# Altium PCB BLDC_Drive.PcbDoc (part 1 of 2)
Units mm, origin at the board's own origin, x right, y up, seen from the top; angles counter-clockwise.
Board outline 173.9 x 91 mm, 4 copper layers (Top Layer, Layer 1, Layer 2, Bottom Layer), stack 0.48 mm thick; 165 components, 96 nets, 478 pads, 711 vias.
Unrouted connection lines stored in the file: 223.
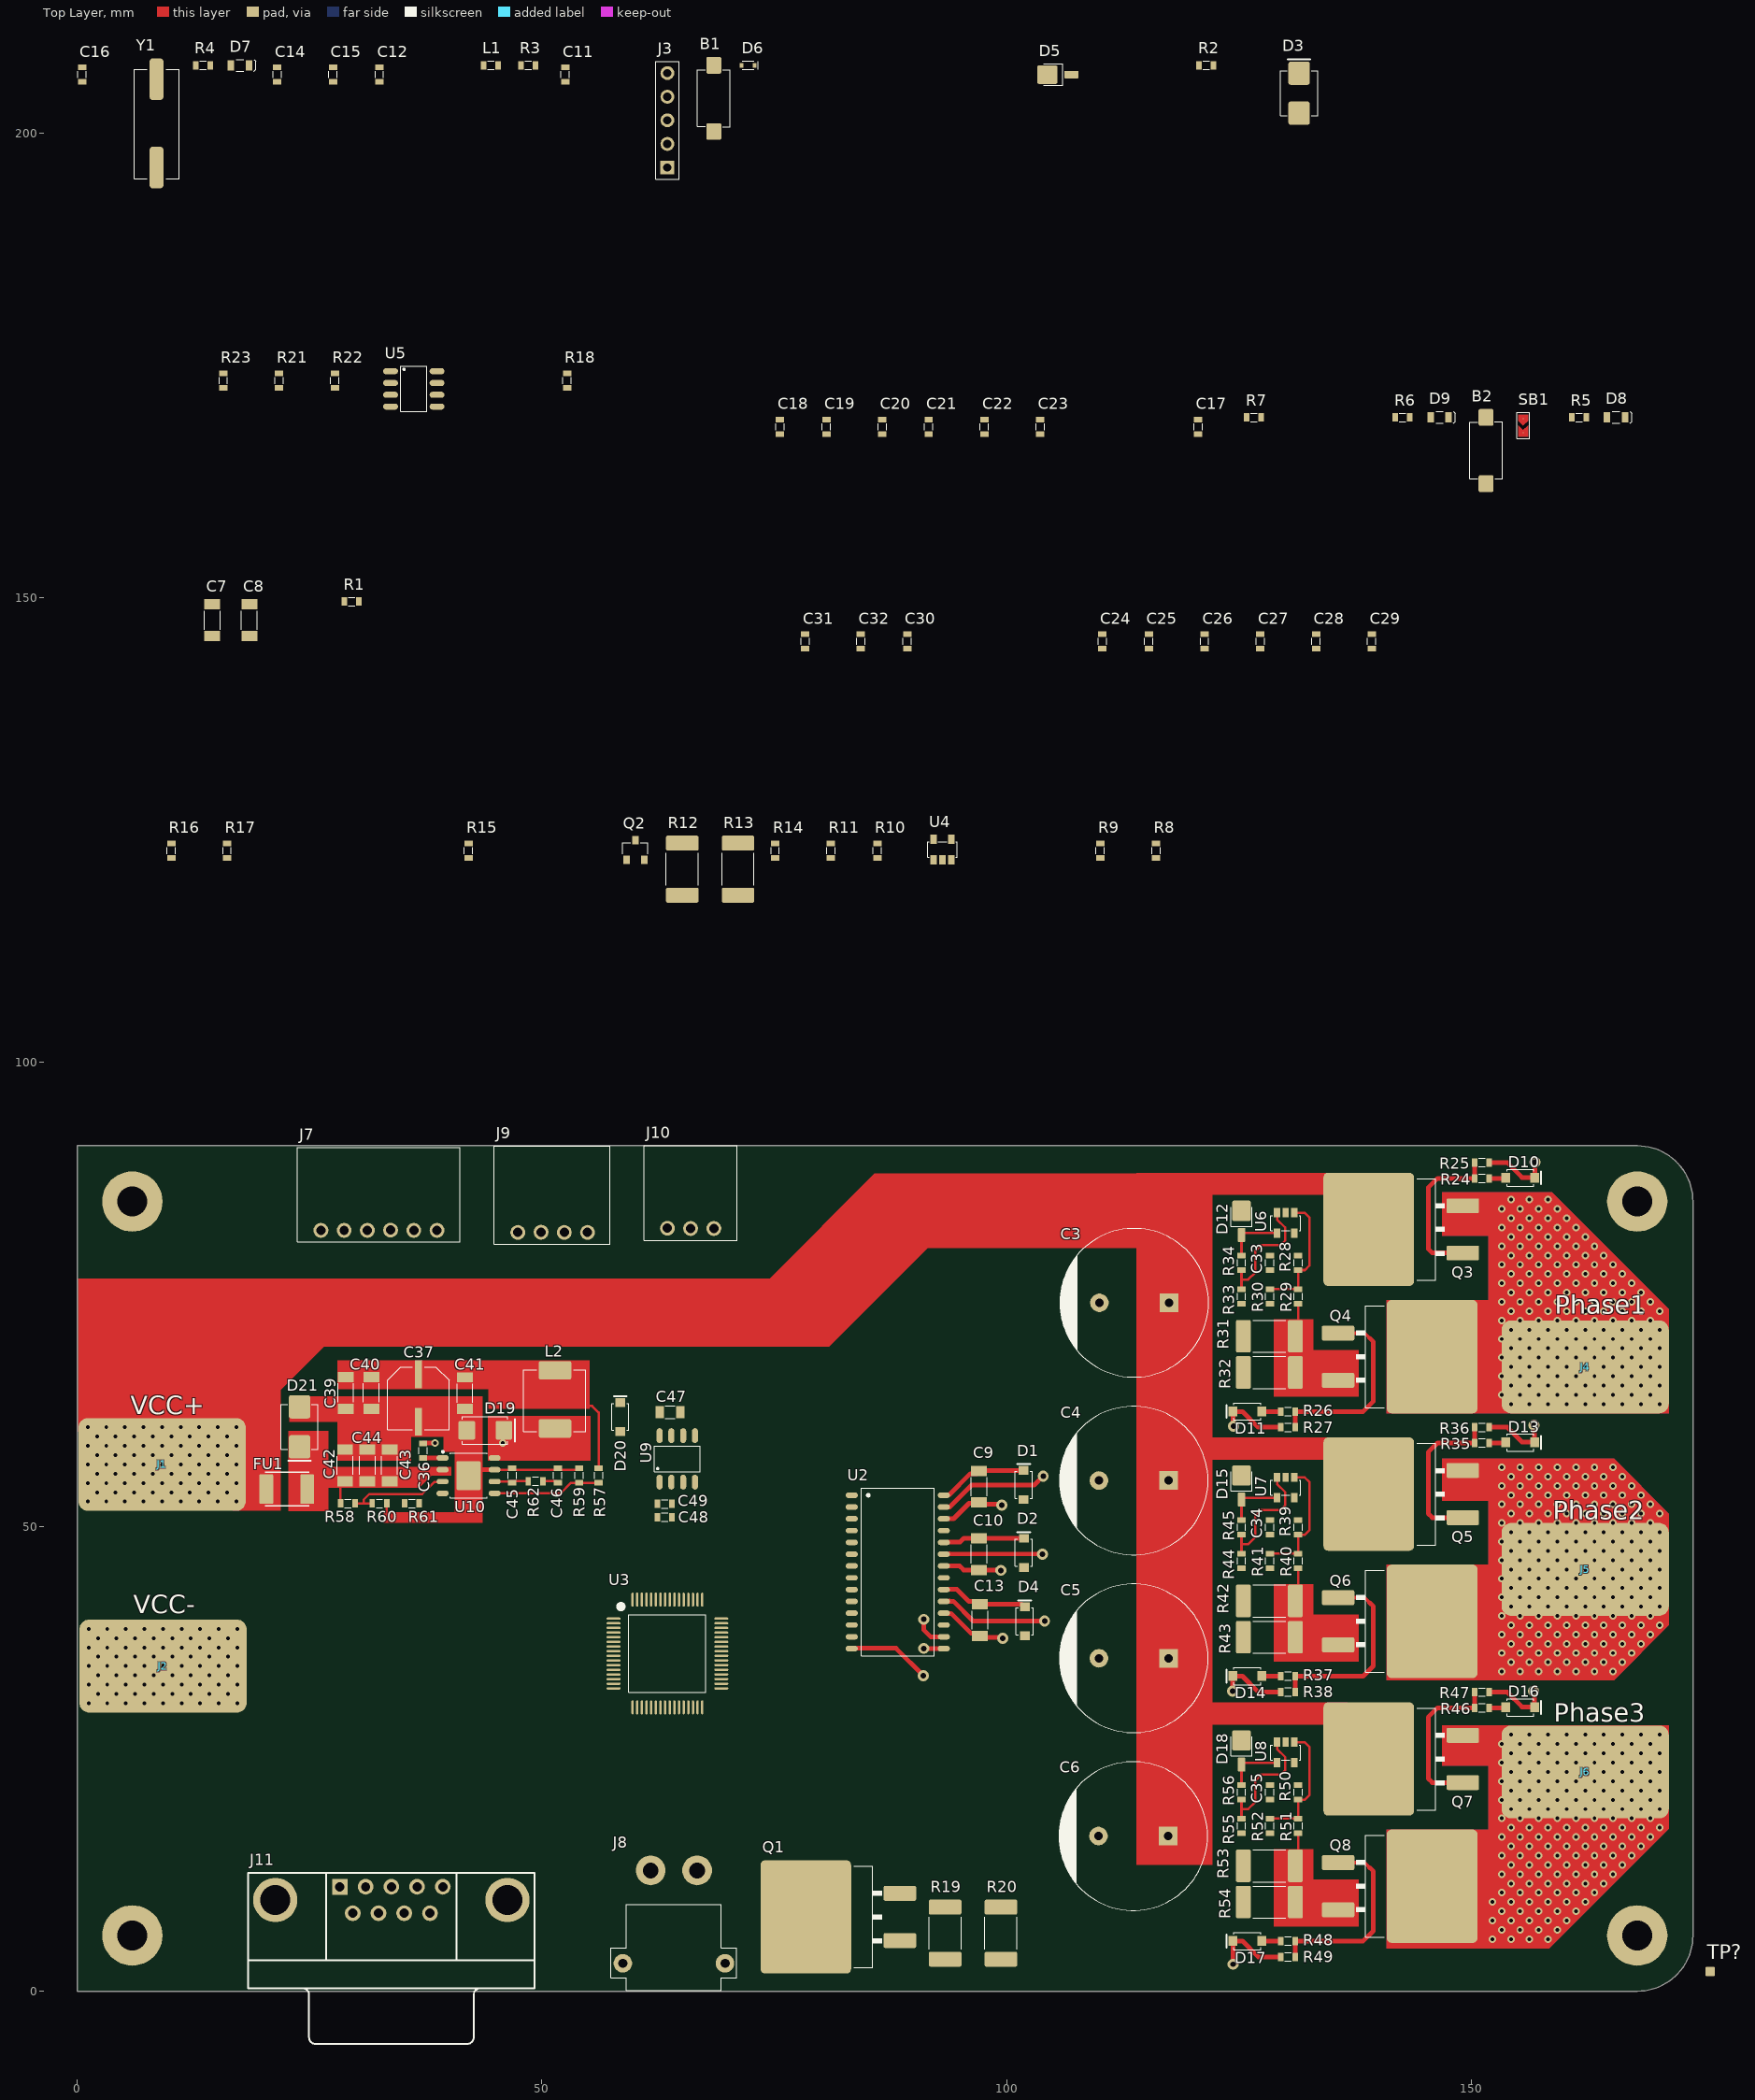
[diagram p0: Top Layer view]
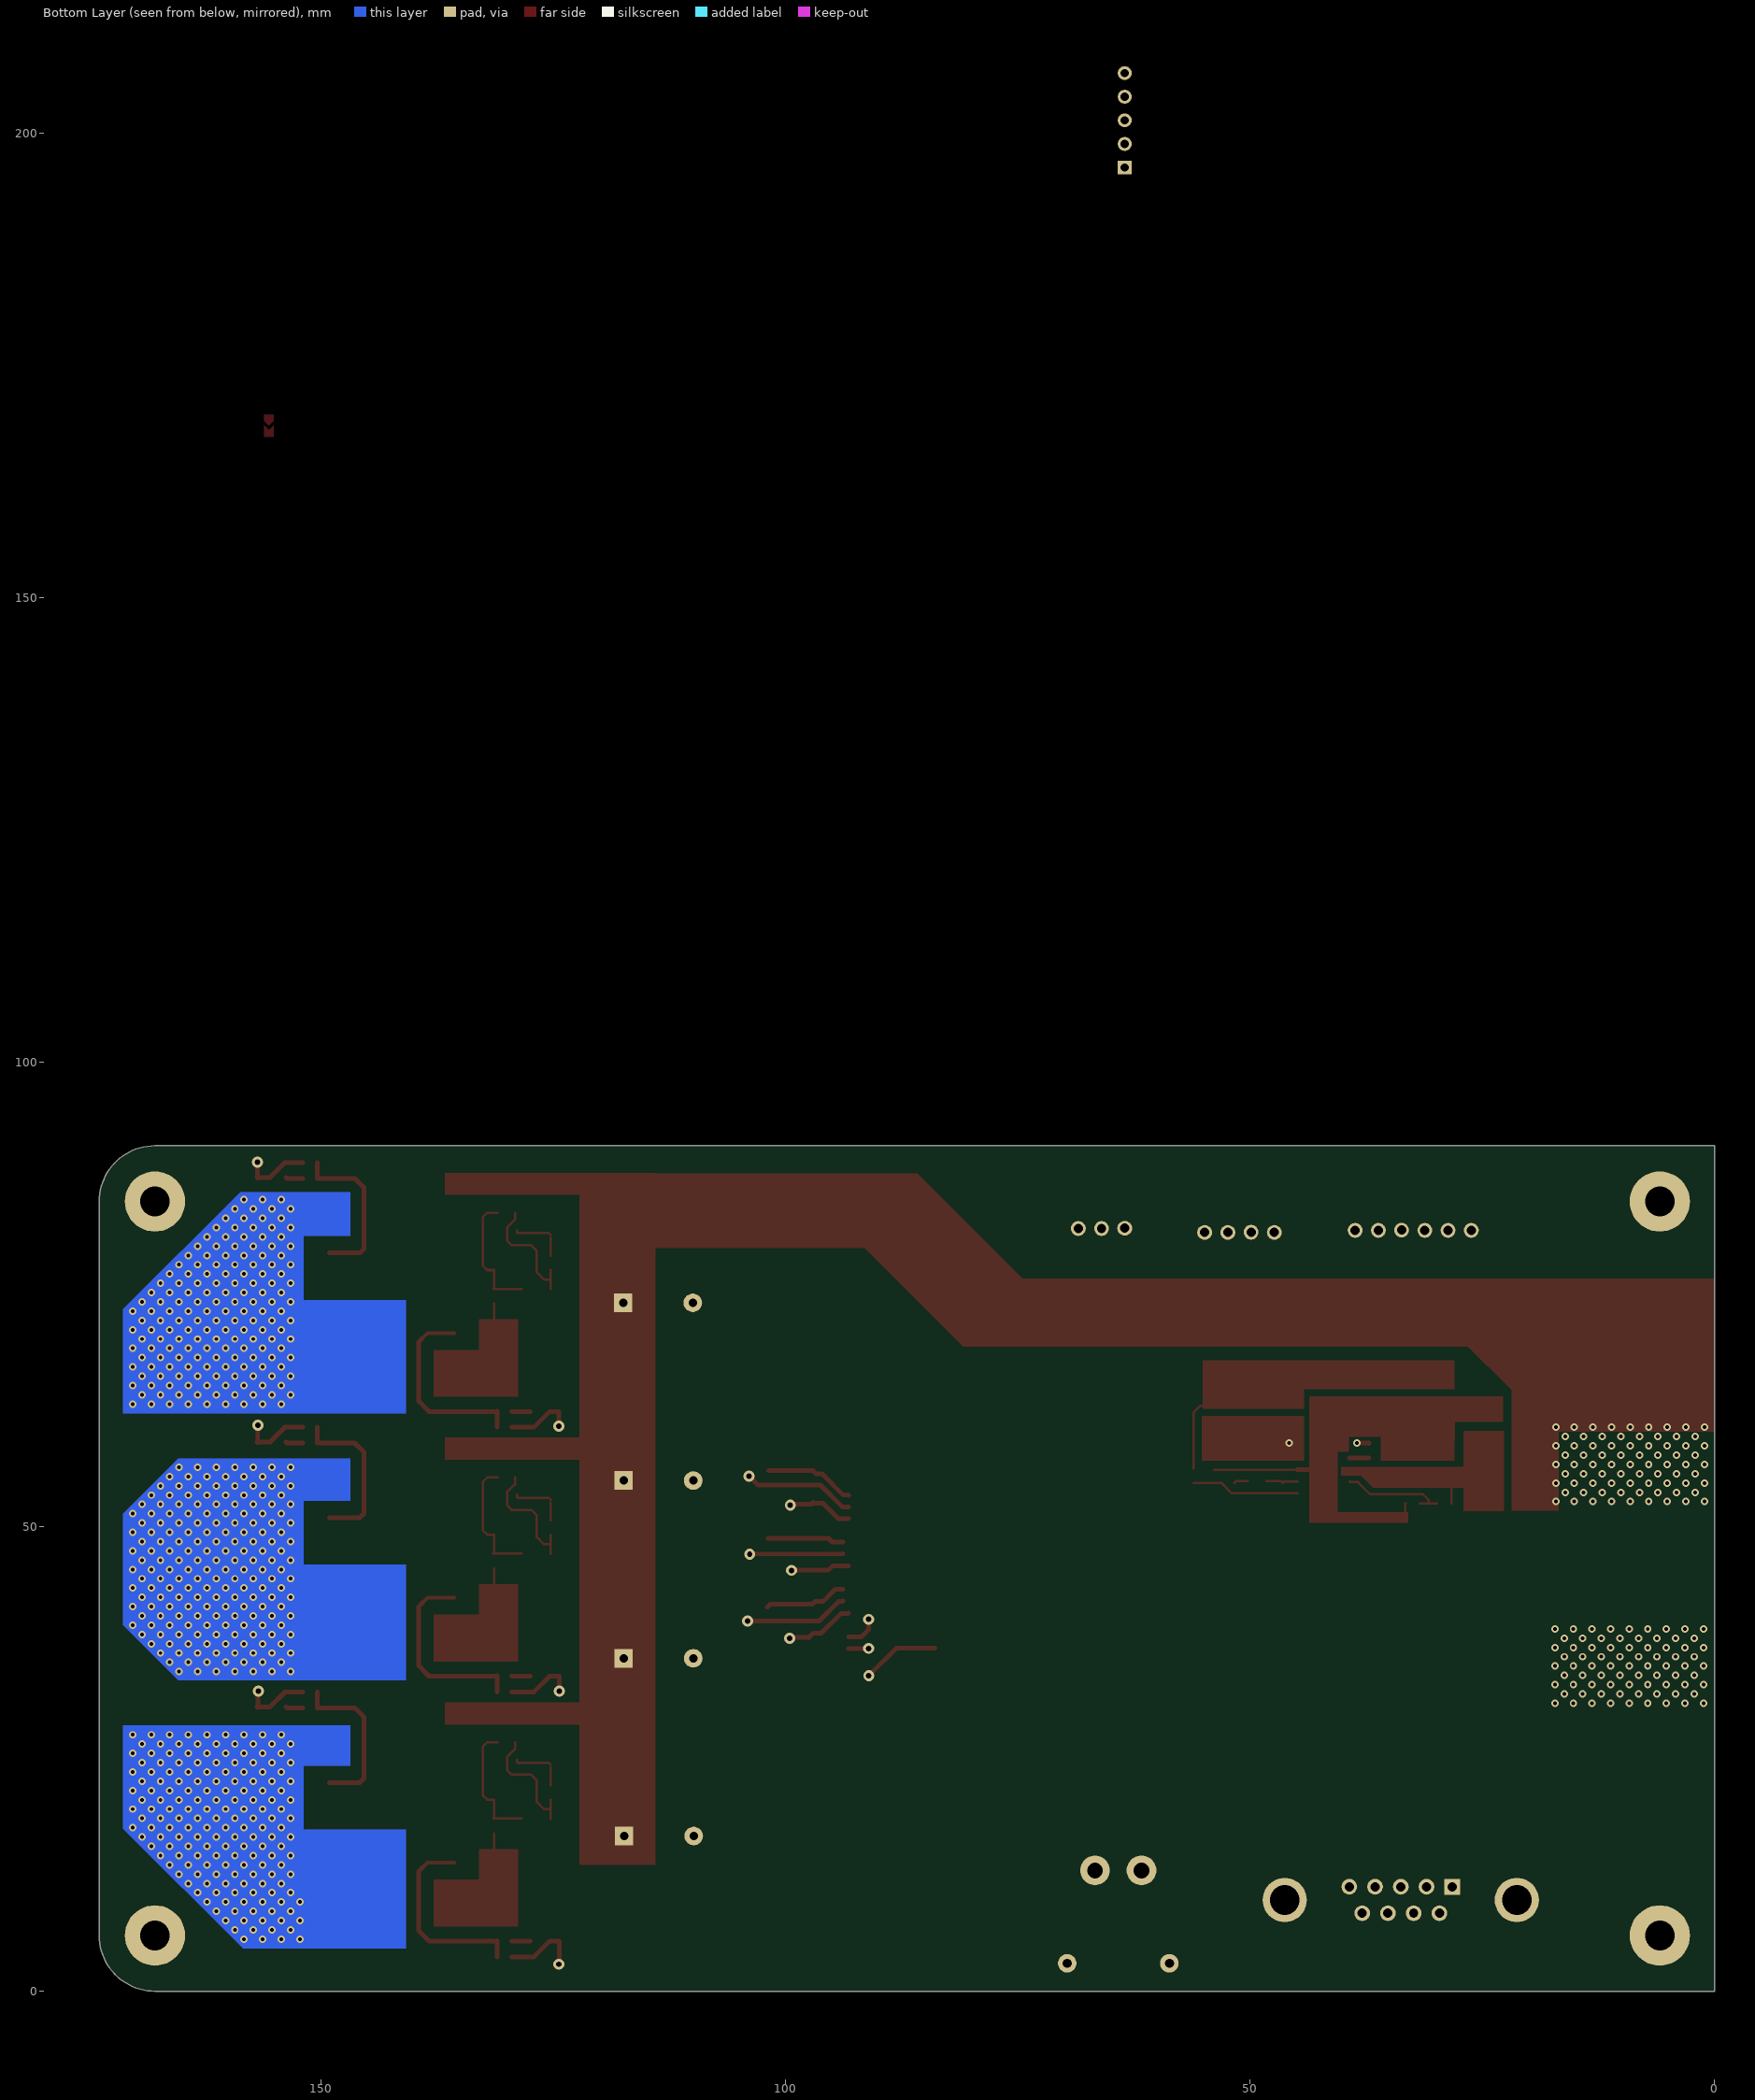
[diagram p1: Bottom Layer view, seen from below]
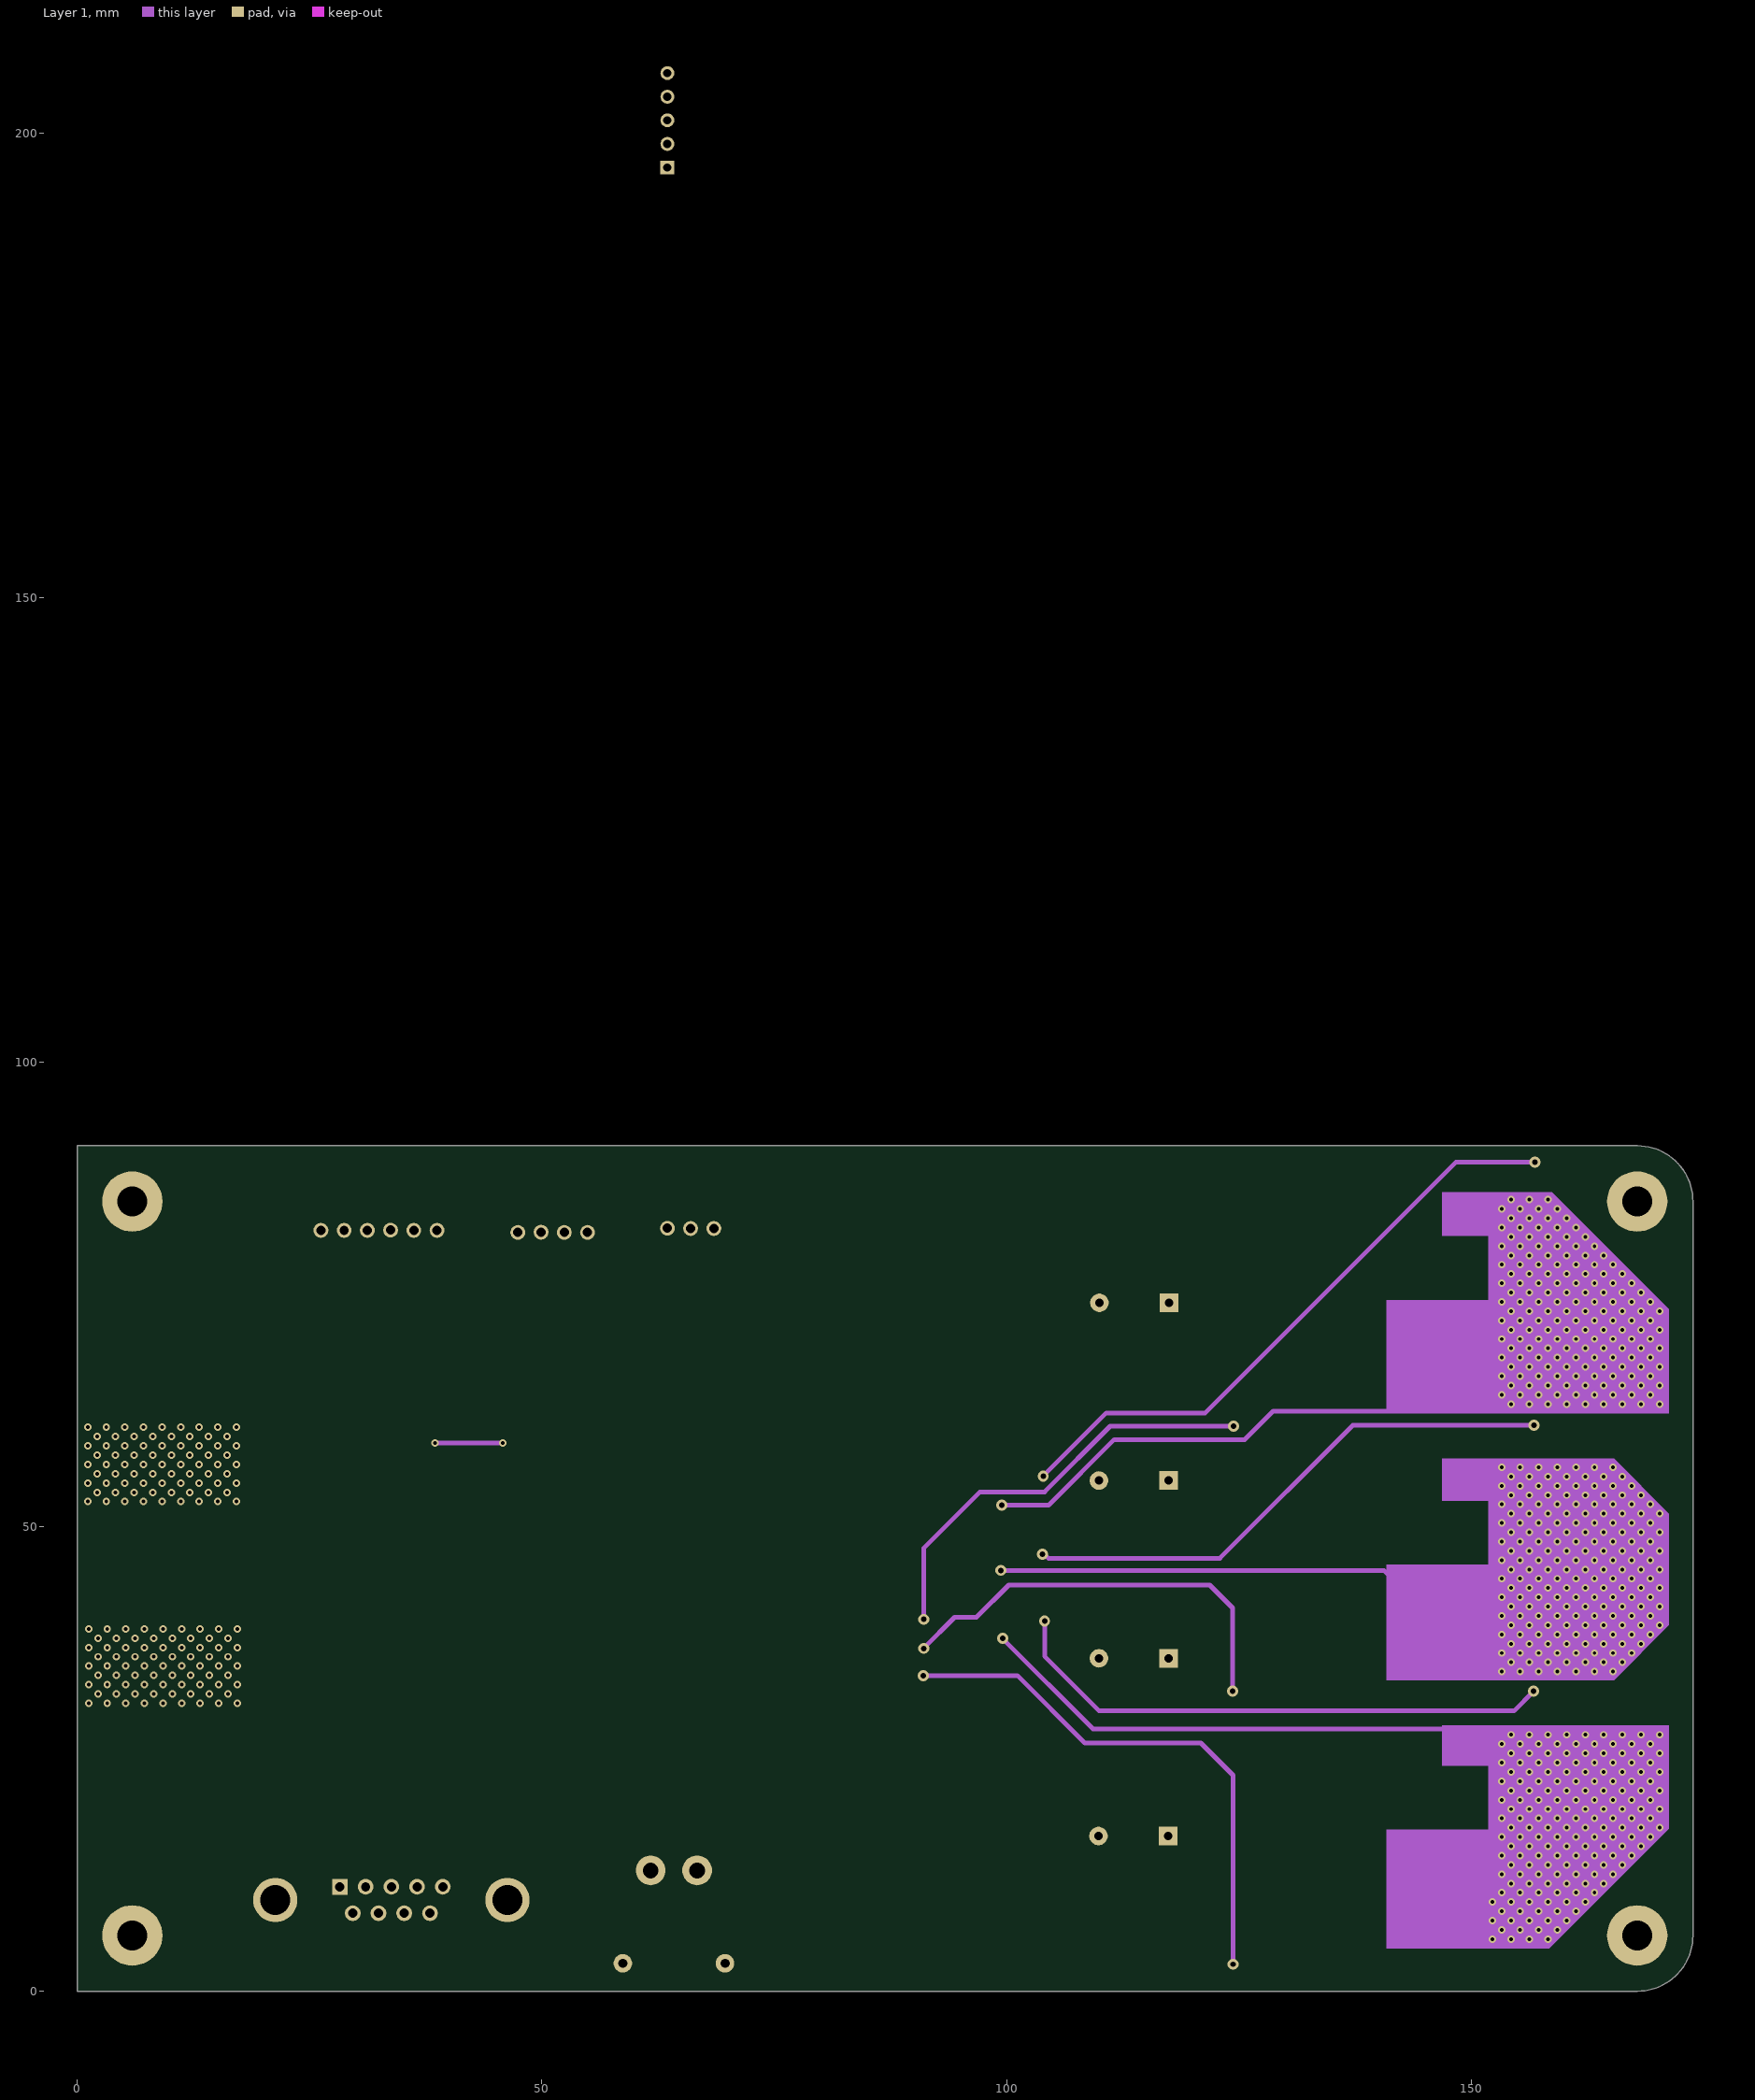
[diagram p2: Layer 1]

## Layer stack, top to bottom
Top Solder: solder mask 0.0102, Solder Resist, Dk 3.5
Top Layer: signal copper 0.0045
Dielectric 2: prepreg 0.0711, PP-006, Dk 4.1
Layer 1: signal copper 0.0045
Dielectric 1: dielectric 0.32, FR-4, Dk 4.8
Layer 2: signal copper 0.0045
Dielectric 3: prepreg 0.0711, PP-006, Dk 4.1
Bottom Layer: signal copper 0.0045
Bottom Solder: solder mask 0.0102, Solder Resist, Dk 3.5

## Board outline
0,0 167.9,0 ccw(c167.9,6) 173.9,6 173.9,85 ccw(c167.9,85) 167.9,91 0,91

## Design rules (kind name [scope] priority, off if disabled: settings)
AcuteAngle [All] p1: minimum=3.50000000000000E+0001 checktracksonly=FALSE
BoardOutlineClearance "BoardOutlineClearance 1" [All] p1: gap=0.25 ignorepadtopadclearanceinfootprint=FALSE except(0: Arc-SplitContinuation Track-SplitContinuation SMDPad-SplitContinuation THPad-SplitContinuation Via-SplitContinuation Fill-SplitContinuation Poly-SplitContinuation Region-SplitContinuation Text-SplitContinuation) // Milling
Clearance ClearanceHV [InNetClass('HV')] p1: gap=0.6 ignorepadtopadclearanceinfootprint=FALSE
Clearance "Clearance-1 1/2 Oz" [All] p2: gap=0.125 ignorepadtopadclearanceinfootprint=FALSE except(0.2: Arc-Fill Arc-Poly Track-Fill Track-Poly SMDPad-SMDPad SMDPad-Fill SMDPad-Poly THPad-Fill THPad-Poly Via-Fill Via-Poly Fill-Fill Fill-Poly Poly-Poly Poly-Region Poly-Text; 0.25: Arc-Hole Track-Hole SMDPad-Hole THPad-Hole Via-Hole Fill-Hole Poly-Hole Region-Hole Text-Hole) // Standart
ComponentClearance [All] p1: gap=0.1 collisioncheckmode=3 verticalgap=0.1 showdistances=FALSE
DiffPairsRouting "DiffPairsRouting 1/2 Oz" [All] p1: maxlimit=0.254 minlimit=0.125 mostfreqgap=0.254 toplayer_minwidth=0.125 toplayer_maxwidth=0.381 toplayer_prefwidth=0.381 midlayer1_minwidth=0.125 midlayer1_maxwidth=0.381 midlayer1_prefwidth=0.381 midlayer2_minwidth=0.125 midlayer2_maxwidth=0.381 midlayer2_prefwidth=0.381 bottomlayer_minwidth=0.125 bottomlayer_maxwidth=0.381 bottomlayer_prefwidth=0.381 maxuncoupledlength=12.7
Height [All] p1: minheight=0 maxheight=50 prefheight=12.7
HoleSize "Minimum HoleSize" [IsPad] p1: absolutevalues=TRUE maxlimit=5.9 minlimit=0.6 maxpercent=80.000 minpercent=20.000
HoleSize "Minimum HoleSize VIA 1" [IsVia] p2: absolutevalues=TRUE maxlimit=5.9 minlimit=0.3 maxpercent=80.000 minpercent=20.000 // Standart
HoleToHoleClearance Hole2HoleClearance [All] p1: gap=0.25 allowstackedmicrovias=FALSE
MinimumAnnularRing "Minimum AR VIA Standart" [All] p1: minimumring=0.15
MinimumAnnularRing "Minimum AR PAD Standart" [All] p2: minimumring=0.2
MinimumSolderMaskSliver "SolderMask Bridge Standart" [All] p1: minsoldermaskwidth=0.15 // All Masks
PlaneClearance "PlaneClearance-1 1/2 Oz" [All] p1: clearance=0.2 // Standart
PlaneConnect "TermalConnect-1 1/2 Oz" [All] p1: planeconnectstyle=Relief reliefexpansion=0.2 reliefentries=4 reliefconductorwidth=0.2 reliefairgap=0.2 // Standart
PolygonConnect "PolygonConnect-1 1/2 Oz" [All] p1: thpad.connectstyle=Relief thpad.reliefconductorwidth=0.254 thpad.reliefentries=4 thpad.polygonreliefangle="90 Angle" thpad.airgapwidth=0.2 smdpad.connectstyle=Relief smdpad.reliefconductorwidth=0.254 smdpad.reliefentries=4 smdpad.polygonreliefangle="90 Angle" smdpad.airgapwidth=0.2 via.connectstyle=Direct via.reliefconductorwidth=0.254 via.reliefentries=4 via.polygonreliefangle="90 Angle" via.airgapwidth=0.254 // Standart
RoomDefinition "Half-Bridge Phase2" [InComponentClass('Half-Bridge Phase2')] p1: confinementstyle=ConfineIn formatcopy=TRUE lockcomponents=FALSE outline 122,31.215 157.8,31.215 157.8,61.415 122,61.415
RoomDefinition "Half-Bridge Phase1" [InComponentClass('Half-Bridge Phase1')] p2: confinementstyle=ConfineIn formatcopy=TRUE lockcomponents=FALSE outline 122,59.7 157.8,59.7 157.8,89.9 122,89.9
RoomDefinition "Half-Bridge Phase3" [InComponentClass('Half-Bridge Phase3')] p3: confinementstyle=ConfineIn formatcopy=TRUE lockcomponents=FALSE outline 122,2.7 157.8,2.7 157.8,32.9 122,32.9
RoutingCorners [All] p1 off: cornerstyle=45-Degree minsetback=2.54 maxsetback=2.54
RoutingVias [All] p1: holewidth=0.4 width=0.8 viastyle="Through Hole" minholewidth=0.3 minwidth=0.6 maxholewidth=5.9 maxwidth=8.9
SilkToSilkClearance Silk2SilkClearance [All] p1 off: silktosilkclearance=0.15
SilkToSolderMaskClearance Silk2SolderMaskClearance [IsPad] p1 off: minsilkscreentomaskgap=0.15 clearancetoexposedcopper=TRUE
SolderMaskExpansion SolderMaskExpansion-1 [All] p1: expansion=0.05 istentingtop=FALSE // Standart
UnRoutedNet [All] p1: checkbadconnections=TRUE
Width "Width 1/2 Oz" [All] p1: maxlimit=10 minlimit=0.125 preferedwidth=0.254 checkconnectedcopper=TRUE
18 further rules are at their usual default settings.

## Classes and differential pairs
net class HV: NetJ8_2 VBUS VS1 VS2 VS3
channel class Half-Bridge: "Half-Bridge Phase1" "Half-Bridge Phase2" "Half-Bridge Phase3"
component class Power: C36 C37 C39 C40 C41 C42 C43 C44 C45 C46 C47 C48 C49 D19 D20 D21 FU1 L2 R57 R58 R59 R60 R61 R62 U9 U10
component class "Half-Bridge Phase3": C35 D16 D17 D18 Q7 Q8 R46 R47 R48 R49 R50 R51 R52 R53 R54 R55 R56 U8
component class "Half-Bridge Phase2": C34 D13 D14 D15 Q5 Q6 R35 R36 R37 R38 R39 R40 R41 R42 R43 R44 R45 U7
component class "Half-Bridge Phase1": C33 D10 D11 D12 Q3 Q4 R24 R25 R26 R27 R28 R29 R30 R31 R32 R33 R34 U6
component class BLDC_Drive: B1 B2 C3 C4 C5 C6 C7 C8 C9 C10 C11 C12 C13 C14 C15 C16 C17 C18 C19 C20 C21 C22 C23 C24 C25 C26 C27 C28 C29 C30 C31 C32 D1 D2 D3 D4 D5 D6 D7 D8 D9 J1 J2 J3 J4 J5 J6 J7 J8 J9 J10 J11 L1 Q1 Q2 R1 R2 R3 R4 R5 R6 R7 R8 R9 R10 R11 R12 R13 R14 R15 R16 R17 R18 R19 R20 R21 R22 R23 SB1 TP? U2 U3 U4 U5 Y1

## Components (designator, comment, footprint, x,y, rotation, side; value= is the part's Value field where it differs from the comment)
B1 "But" "BUTTON 6x3.5" 68.5,207.3 r0 top
B2 "But" "BUTTON 6x3.5" 151.625,169.4 r0 top
C3 "470uF" "ECAP 16x25mm" 117.5,74.1 r180 top
C4 "470uF" "ECAP 16x25mm" 117.45,54.967 r180 top
C5 "470uF" "ECAP 16x25mm" 117.45,35.833 r180 top
C6 "470uF" "ECAP 16x25mm" 117.4,16.7 r180 top
C7 "4.7uF" "1206 Capacitor" 14.5,147.575 r90 top
C8 "4.7uF" "1206 Capacitor" 18.5,147.575 r90 top
C9 "0.1uF" "1206 Capacitor" 97.05,54.3 r90 top
C10 "0.1uF" "1206 Capacitor" 97.05,47.05 r90 top
C11 "0.1uF" "0603 Capicator" 52.5,206.3 r90 top
C12 "18pF" "0603 Capicator" 32.5,206.3 r90 top (schematic designator C13)
C13 "0.1uF" "1206 Capacitor" 97.15,39.95 r90 top (schematic designator C12)
C14 "0.1uF" "0603 Capicator" 21.5,206.3 r90 top (schematic designator C28)
C15 "0.1uF" "0603 Capicator" 27.5,206.3 r90 top (schematic designator C29)
C16 "18pF" "0603 Capicator" 0.5,206.3 r90 top (schematic designator C14)
C17 "0.1uF" "0603 Capicator" 120.625,168.4 r90 top (schematic designator C15)
C18 "0.1uF" "0603 Capicator" 75.625,168.4 r90 top (schematic designator C16)
C19 "4.7uF" "0603 Capicator" 80.625,168.4 r90 top (schematic designator C17)
C20 "0.1uF" "0603 Capicator" 86.625,168.4 r90 top (schematic designator C18)
C21 "0.1uF" "0603 Capicator" 91.625,168.4 r90 top (schematic designator C19)
C22 "0.1uF" "0603 Capicator" 97.625,168.4 r90 top (schematic designator C20)
C23 "0.1uF" "0603 Capicator" 103.625,168.4 r90 top (schematic designator C21)
C24 "0.1uF" "0603 Capicator" 110.325,145.275 r90 top (schematic designator C22)
C25 "0.1uF" "0603 Capicator" 115.325,145.275 r90 top (schematic designator C23)
C26 "0.1uF" "0603 Capicator" 121.325,145.275 r90 top (schematic designator C24)
C27 "0.1uF" "0603 Capicator" 127.325,145.275 r90 top (schematic designator C25)
C28 "0.1uF" "0603 Capicator" 133.325,145.275 r90 top (schematic designator C26)
C29 "0.1uF" "0603 Capicator" 139.325,145.275 r90 top (schematic designator C27)
C30 "0.1uF" "0603 Capicator" 89.325,145.275 r90 top (schematic designator C33)
C31 "10nF" "0603 Capicator" 78.325,145.275 r90 top (schematic designator C30)
C32 "1uF" "0603 Capicator" 84.325,145.275 r90 top (schematic designator C31)
C33 "0.1uF" "0603 Capicator" 128.35,78.4 r270 top (schematic designator C32)
C34 "0.1uF" "0603 Capicator" 128.35,49.915 r270 top (schematic designator C32)
C35 "0.1uF" "0603 Capicator" 128.35,21.4 r270 top (schematic designator C32)
C36 "0.1uF" "0603 Capicator" 37.2,58.2 r90 top (schematic designator C34)
C37 "47uF" "Bar Cap 6.3x7.7" 36.7,61.295 r180 top (schematic designator C35)
C39 "4.7uF" "1206 Capacitor" 28.875,64.4 r90 top (schematic designator C37)
C40 "0.1uF" "1206 Capacitor" 31.625,64.4 r90 top (schematic designator C46)
C41 "0.1uF" "1206 Capacitor" 41.7,64.375 r90 top (schematic designator C47)
C42 "4.7uF" "1206 Capacitor" 28.8,56.6 r270 top (schematic designator C38)
C43 "2.2uF" "1206 Capacitor" 33.6,56.6 r270 top (schematic designator C39)
C44 "2.2uF" "1206 Capacitor" 31.2,56.6 r270 top (schematic designator C40)
C45 "22pF" "0603 Capicator" 46.8,55.5 r270 top (schematic designator C41)
C46 "22nF" "0603 Capicator" 51.7,55.5 r270 top (schematic designator C42)
C47 "0.33uF" "0805 Capicator" 63.775,62.35 r180 top (schematic designator C43)
C48 "0.1uF" "0603 Capicator" 63.2,51.025 r180 top (schematic designator C44)
C49 "0.1uF" "0603 Capicator" 63.225,52.45 r180 top (schematic designator C45)
D1 "120V, 1A" SOD-123FL 101.85,52.925 r90 top
D2 "120V, 1A" SOD-123FL 101.875,45.625 r90 top
D3 "TVS 48V" SMB 131.5,204.3 r90 top
D4 "120V, 1A" SOD-123FL 101.975,38.25 r90 top
D5 "TVS 3.3V" DO-216AA 105.5,206.3 r0 top
D6 "40V, 200mA" SOD-523 71.5,207.3 r0 top
D7 "LedG" "0805 LED" 17.5,207.3 r0 top
D8 "LedY" "0805 LED" 165.625,169.4 r0 top
D9 "LedR" "0805 LED" 146.625,169.4 r0 top
D10 "60V, 1A" SOD-123FL 153.75,87.55 r0 top
D11 "60V, 1A" SOD-123FL 127.5,62.4 r180 top
D12 "TVS 3.3V" DO-216AA 125.3,82.9 r270 top
D13 "60V, 1A" SOD-123FL 153.75,59.065 r0 top (schematic designator D10)
D14 "60V, 1A" SOD-123FL 127.5,33.915 r180 top (schematic designator D11)
D15 "TVS 3.3V" DO-216AA 125.3,54.415 r270 top (schematic designator D12)
D16 "60V, 1A" SOD-123FL 153.75,30.55 r0 top (schematic designator D10)
D17 "60V, 1A" SOD-123FL 127.5,5.4 r180 top (schematic designator D11)
D18 "TVS 3.3V" DO-216AA 125.3,25.9 r270 top (schematic designator D12)
D19 "40V, 3A" SMA 43.9,60.375 r0 top (schematic designator D13)
D20 "TVS 20V" SOD-123FL 58.425,60.25 r90 top (schematic designator D15)
D21 "TVS 48V" SMB 23.9,60.75 r270 top (schematic designator D14)
FU1 "1.5A" "1812 Fuse" 22.525,54.05 r0 top
J1 "VCC+" Cable25 9.1,56.7 r180 top
J2 "VCC-" Cable25 9.2,35 r180 top (schematic designator J8)
J3 "PLS 5x1" "PLS 5x1" 63.5,196.3 r90 top (schematic designator J2)
J4 "Phase1" Cable25 162.3,67.2 r180 top (schematic designator J9)
J5 "Phase2" Cable25 162.3,45.4 r180 top (schematic designator J10)
J6 "Phase3" Cable25 162.3,23.6 r180 top (schematic designator J11)
J7 "CWF-6P" Conn6x1 38.7,81.9 r180 top (schematic designator J3)
J8 "XT30" "HEADER 2 XT30PW Male" 66.7,13 r180 top (schematic designator J4)
J9 "CWF-4P" Conn4x1 54.9,81.675 r180 top (schematic designator J6)
J10 "CWF-3P" Conn3x1 68.5,82.1 r180 top (schematic designator J5)
J11 "DB9" DB9 46.28,9.82 r180 top (schematic designator J7)
L1 "220Ω, 1.4A" "0603 Inductor" 44.5,207.3 r0 top
L2 "8.2uH, 4A" "Inductor 6.9x6.5" 51.4,63.7 r90 top
Q1 "100V, 59A, 18mΩ" "D2-PAK (TO-262)" 88.525,8 r90 top (schematic designator Q3)
Q2 "45V, 500mA" SOT-23 59.1,121.775 r0 top (schematic designator Q4)
Q3 "100V, 59A, 18mΩ" "D2-PAK (TO-262)" 149.125,82 r90 top (schematic designator Q1)
Q4 "100V, 59A, 18mΩ" "D2-PAK (TO-262)" 135.7,68.3 r270 top (schematic designator Q2)
Q5 "100V, 59A, 18mΩ" "D2-PAK (TO-262)" 149.125,53.515 r90 top (schematic designator Q1)
Q6 "100V, 59A, 18mΩ" "D2-PAK (TO-262)" 135.7,39.815 r270 top (schematic designator Q2)
Q7 "100V, 59A, 18mΩ" "D2-PAK (TO-262)" 149.125,25 r90 top (schematic designator Q1)
Q8 "100V, 59A, 18mΩ" "D2-PAK (TO-262)" 135.7,11.3 r270 top (schematic designator Q2)
R1 "100k" "0603 Resistor" 29.5,149.575 r0 top
R2 "6.2k" "0603 Resistor" 121.5,207.3 r0 top
R3 "1k" "0603 Resistor" 48.5,207.3 r0 top
R4 "510R" "0603 Resistor" 13.5,207.3 r0 top
R5 "510R" "0603 Resistor" 161.625,169.4 r0 top
R6 "510R" "0603 Resistor" 142.625,169.4 r0 top
R7 "3.9k" "0603 Resistor" 126.625,169.4 r0 top
R8 "100R" "0603 Resistor" 116.1,122.775 r90 top (schematic designator R20)
R9 "100k" "0603 Resistor" 110.1,122.775 r90 top (schematic designator R26)
R10 "10k" "0603 Resistor" 86.1,122.775 r90 top (schematic designator R27)
R11 "75k" "0603 Resistor" 81.1,122.775 r90 top (schematic designator R21)
R12 "25mR" "2512 Resistor" 65.1,120.775 r90 top (schematic designator R22)
R13 "25mR" "2512 Resistor" 71.1,120.775 r90 top (schematic designator R23)
R14 "4.7k" "0603 Resistor" 75.1,122.775 r90 top (schematic designator R19)
R15 "4.7k" "0603 Resistor" 42.1,122.775 r90 top (schematic designator R36)
R16 "100k" "0603 Resistor" 10.1,122.775 r90 top (schematic designator R28)
R17 "10k" "0603 Resistor" 16.1,122.775 r90 top (schematic designator R29)
R18 "24k" "0603 Resistor" 52.7,173.375 r90 top (schematic designator R37)
R19 "25mR" "2512 Resistor" 93.4,6.25 r90 top (schematic designator R24)
R20 "25mR" "2512 Resistor" 99.4,6.25 r90 top (schematic designator R25)
R21 "24k" "0603 Resistor" 21.7,173.375 r90 top (schematic designator R38)
R22 "120R" "0603 Resistor" 27.7,173.375 r90 top (schematic designator R39)
R23 "4.7k" "0603 Resistor" 15.7,173.375 r90 top (schematic designator R40)
R24 "0R" "0603 Resistor" 151.2,87.5 r180 top (schematic designator R8)
R25 "100R" "0603 Resistor" 151.2,89.2 r180 top (schematic designator R9)
R26 "0R" "0603 Resistor" 130.3,62.4 r0 top (schematic designator R10)
R27 "100R" "0603 Resistor" 130.3,60.7 r0 top (schematic designator R11)
R28 "100k" "0603 Resistor" 131.4,78.4 r90 top (schematic designator R12)
R29 "510R" "0603 Resistor" 131.4,74.785 r90 top (schematic designator R13)
R30 "100k" "0603 Resistor" 128.35,74.785 r90 top (schematic designator R14)
R31 "1mR" "2512 Resistor" 128.3,70.5 r0 top (schematic designator R15)
R32 "1mR" "2512 Resistor" 128.3,66.6 r0 top (schematic designator R16)
R33 "1k" "0603 Resistor" 125.3,74.785 r90 top (schematic designator R17)
R34 "100k" "0603 Resistor" 125.3,78.4 r90 top (schematic designator R18)
R35 "0R" "0603 Resistor" 151.2,59.015 r180 top (schematic designator R8)
R36 "100R" "0603 Resistor" 151.2,60.715 r180 top (schematic designator R9)
R37 "0R" "0603 Resistor" 130.3,33.915 r0 top (schematic designator R10)
R38 "100R" "0603 Resistor" 130.3,32.215 r0 top (schematic designator R11)
R39 "100k" "0603 Resistor" 131.4,49.915 r90 top (schematic designator R12)
R40 "510R" "0603 Resistor" 131.4,46.3 r90 top (schematic designator R13)
R41 "100k" "0603 Resistor" 128.35,46.3 r90 top (schematic designator R14)
R42 "1mR" "2512 Resistor" 128.3,42.015 r0 top (schematic designator R15)
R43 "1mR" "2512 Resistor" 128.3,38.115 r0 top (schematic designator R16)
R44 "1k" "0603 Resistor" 125.3,46.3 r90 top (schematic designator R17)
R45 "100k" "0603 Resistor" 125.3,49.915 r90 top (schematic designator R18)
R46 "0R" "0603 Resistor" 151.2,30.5 r180 top (schematic designator R8)
R47 "100R" "0603 Resistor" 151.2,32.2 r180 top (schematic designator R9)
R48 "0R" "0603 Resistor" 130.3,5.4 r0 top (schematic designator R10)
R49 "100R" "0603 Resistor" 130.3,3.7 r0 top (schematic designator R11)
R50 "100k" "0603 Resistor" 131.4,21.4 r90 top (schematic designator R12)
R51 "510R" "0603 Resistor" 131.4,17.785 r90 top (schematic designator R13)
R52 "100k" "0603 Resistor" 128.35,17.785 r90 top (schematic designator R14)
R53 "1mR" "2512 Resistor" 128.3,13.5 r0 top (schematic designator R15)
R54 "1mR" "2512 Resistor" 128.3,9.6 r0 top (schematic designator R16)
R55 "1k" "0603 Resistor" 125.3,17.785 r90 top (schematic designator R17)
R56 "100k" "0603 Resistor" 125.3,21.4 r90 top (schematic designator R18)
R57 "24k" "0603 Resistor" 56.1,55.5 r90 top (schematic designator R30)
R58 "560k" "0603 Resistor" 29.1,52.5 r180 top (schematic designator R31)
R59 "1k" "0603 Resistor" 54,55.5 r270 top (schematic designator R32)
R60 "39k" "0603 Resistor" 32.5,52.5 r180 top (schematic designator R33)
R61 "120k" "0603 Resistor" 36,52.5 r180 top (schematic designator R34)
R62 "24k" "0603 Resistor" 49.3,54.9 r180 top (schematic designator R35)
SB1 "Circuit Breaker" "SB 0603" 155.625,168.4 r90 top
TP? "TestPoint" TestPoint 175.734,2.127 r90 top
U2 "Driver" "SOIC-28 Wide" 83.344,53.39 r270 top
U3 "STM32F103RCT6" LQFP64 63.5,36.35 r0 top
U4 "OpAmp" SOT-23-5 93.1,121.775 r0 top (schematic designator U5)
U5 "RS-485" SOIC-8 33.7,174.375 r0 top (schematic designator U6)
U6 "OpAmp" SOT-23-5 130.05,83.8 r180 top (schematic designator U4)
U7 "OpAmp" SOT-23-5 130.05,55.315 r180 top (schematic designator U4)
U8 "OpAmp" SOT-23-5 130.05,26.8 r180 top (schematic designator U4)
U9 "LDO 3.3V" SOIC-8 62.655,54.8 r90 top (schematic designator U7)
U10 "DC/DC" HSOP-8 42.1,55.495 r0 top (schematic designator U8)
Y1 "8MHz" hc-49sm 8.5,196.3 r90 top

## Footprints (in the part's own frame and the unit in brackets; to place one, negate y for a bottom-side part, rotate by r counter-clockwise, add the part's x,y. Pads: shape width x height; smd on the part's side, far side on the other; paste and mask are expansions set on the pad)
"0603 Capicator" [mm]
  rect 0.6x0.9 smd: 1(-0.78,0) 2(0.78,0)
  silkscreen extent -0.35,-0.45 0.35,0.45, body extent -0.82,-0.45 0.88,0.45, height 0.9
"0603 Inductor" [mm]
  rect 0.6x0.9 smd: 1(-0.78,0) 2(0.78,0)
  silkscreen extent -0.35,-0.45 0.35,0.45, body extent -0.87,-0.48 0.87,0.47, height 0.95
"0603 Resistor" [mm]
  rect 0.6x0.9 smd: 1(-0.78,0) 2(0.78,0)
  silkscreen extent -0.35,-0.45 0.35,0.45, body extent -0.85,-0.45 0.85,0.45, height 0.55
"0805 Capicator" [mm]
  rect 0.9x1.3 smd: 1(-1.1,0) 2(1.1,0)
  silkscreen extent -0.53,-0.67 0.53,0.67, body extent -1.05,-0.67 1.05,0.68, height 0.75
"0805 LED" [mm]
  rect 0.7x1.1 smd: 1(-0.975,0) 2(0.975,0)
  silkscreen extent -0.4,-0.63 1.68,0.63, body extent -1.01,-0.62 1.01,0.62, height 1.1
"1206 Capacitor" [mm]
  rect 1.1x1.7 smd: 1(-1.7,0) 2(1.7,0)
  silkscreen extent -1,-0.85 1,0.85, body extent -1.68,-0.87 1.67,0.87, height 1
"1812 Fuse" [mm]
  rrect20% 1.5x3.2 smd: 1(-2.2,0) 2(2.2,0)
  silkscreen extent -2.32,-1.8 2.42,1.8, body extent -2.32,-1.74 2.41,1.74, height 1.03
"2512 Resistor" [mm]
  rrect20% 1.6x3.5 smd: 1(-2.8,0) 2(2.8,0)
  silkscreen extent -1.75,-1.73 1.75,1.73, body extent -3.2,-1.65 3.2,1.65, height 0.65
"Bar Cap 6.3x7.7" [mm]
  rect 0.8x3 smd: 1(0,0) 2(0,-5.105)
  silkscreen extent -3.3,-5.89 3.3,0.84, body extent -3.3,-6.19 3.3,1.11, height 7.7
"BUTTON 6x3.5" [mm]
  rrect20% 1.6x1.8 smd: 1(0,0) 2(0,-7.125)
  silkscreen extent -1.75,-6.63 1.75,-0.48, body extent -1.75,-7.52 1.75,0.48, height 4.3
Cable25 [mm]
  rrect20% 18x10 smd: 1(0,0)
Conn3x1 [mm] "DS1069-6 MR"
  round 1.6 hole 1: 1(0,0) 2(2.5,0) 3(5,-0.025)
  silkscreen extent -2.5,-8.93 7.5,1.28, body extent -2.5,-8.92 7.5,2.58, height 5.75
Conn4x1 [mm] "DS1069-6 MR"
  round 1.6 hole 1: 1(0,0) 2(2.5,0) 3(5,-0.025) 4(7.5,0)
  silkscreen extent -2.4,-9.28 10.05,1.28, body extent -2.37,-9.25 10.02,2.25, height 5.85
Conn6x1 [mm] "DS1069-6 MR"
  round 1.6 hole 1: 1(0,0) 2(2.5,0) 3(5,-0.025) 4(7.5,0) 5(10,0) 6(12.5,0)
  silkscreen extent -2.45,-8.9 15.02,1.25, body extent -2.47,-8.88 15.03,2.62, height 5.75
"D2-PAK (TO-262)" [mm]
  rrect20% 1.6x3.5 smd: 1(-2.54,0) 3(2.54,0)
  rrect10% 12.2x9.75 smd: 2(0,10.125)
  silkscreen extent -5.48,1.92 5.48,4.95, body extent -5.33,-1.27 5.34,13.97, height 4.83
DB9 [mm]
  rect 1.69x1.69 hole 1: 1(18.035,-1.42)
  round 1.69 hole 1: 2(15.265,-1.42) 3(12.495,-1.42) 4(9.725,-1.42) 5(6.955,-1.42) 6(16.65,1.42) 7(13.88,1.42) 8(11.11,1.42) 9(8.34,1.42)
  round 4.76 hole 3.2: A(0,0) A(24.99,0)
  silkscreen extent -2.91,-2.9 27.89,15.5, body extent -2.97,-2.85 27.92,15.55, height 12.53
DO-216AA [mm]
  rrect20% 2.2x2 smd: 1(-1.1,0)
  rrect20% 1.5x0.8 smd: 2(1.5,0)
  silkscreen extent -1.5,-1.15 0.58,1.15, body extent -1.91,-0.93 1.85,0.98, height 1.02
"ECAP 16x25mm" [mm]
  round 2 hole 0.9: 1(7.5,0)
  rect 2x2 hole 0.9: 2(0,0)
  silkscreen extent -4.25,-8 11.75,8, body extent -4.52,-8.27 11.98,8.22, height 26.4
hc-49sm [mm]
  rrect50% 4.5x1.5 smd: 1(0,0) 2(9.5,0)
  silkscreen extent -1.23,-2.45 10.55,2.4, body extent -1.7,-2.44 11.1,2.39
"HEADER 2 XT30PW Male" [mm]
  round 3.2 hole 1.7: 1(0,0) 2(5,0)
  round 2 hole 1: A(-3,10) A(8,10)
  silkscreen extent -4.25,3.67 9.3,12.93, body extent -4.12,-1.05 9.18,12.9, height 5.1
HSOP-8 [mm]
  oval 1.3x0.6 smd mask+0.03: 1(-2.8,1.905) 2(-2.8,0.635) 3(-2.8,-0.635) 4(-2.8,-1.905) 5(2.8,-1.905) 6(2.8,-0.635) 7(2.8,0.635) 8(2.8,1.905)
  rrect10% 2.6x3.1 smd mask+0.03: A(0,0)
  silkscreen extent -2.87,-2.4 2,2.67, body extent -3.01,-2.35 3.01,2.35, height 1.7
"Inductor 6.9x6.5" [mm]
  rrect20% 2x3.5 smd: 1(-3.125,0) 2(3.125,0)
  silkscreen extent -3.47,-3.3 3.18,3.4, body extent -3.65,-3.25 3.36,3.35, height 2.9
LQFP64 [mm]
  oval 1.5x0.254 smd paste+0 mask+0.02: 1(-5.8,3.75) 2(-5.8,3.25) 3(-5.8,2.75) 4(-5.8,2.25) 5(-5.8,1.75) 6(-5.8,1.25) 7(-5.8,0.75) 8(-5.8,0.25) 9(-5.8,-0.25) 10(-5.8,-0.75) 11(-5.8,-1.25) 12(-5.8,-1.75) 13(-5.8,-2.25) 14(-5.8,-2.75) 15(-5.8,-3.25) 16(-5.8,-3.75) 33(5.8,-3.75) 34(5.8,-3.25) 35(5.8,-2.75) 36(5.8,-2.25) 37(5.8,-1.75) 38(5.8,-1.25) 39(5.8,-0.75) 40(5.8,-0.25) 41(5.8,0.25) 42(5.8,0.75) 43(5.8,1.25) 44(5.8,1.75) 45(5.8,2.25) 46(5.8,2.75) 47(5.8,3.25) 48(5.8,3.75)
  oval 0.254x1.5 smd paste+0 mask+0.02: 17(-3.75,-5.8) 18(-3.25,-5.8) 19(-2.75,-5.8) 20(-2.25,-5.8) 21(-1.75,-5.8) 22(-1.25,-5.8) 23(-0.75,-5.8) 24(-0.25,-5.8) 25(0.25,-5.8) 26(0.75,-5.8) 27(1.25,-5.8) 28(1.75,-5.8) 29(2.25,-5.8) 30(2.75,-5.8) 31(3.25,-5.8) 32(3.75,-5.8) 49(3.75,5.8) 50(3.25,5.8) 51(2.75,5.8) 52(2.25,5.8) 53(1.75,5.8) 54(1.25,5.8) 55(0.75,5.8) 56(0.25,5.8) 57(-0.25,5.8) 58(-0.75,5.8) 59(-1.25,5.8) 60(-1.75,5.8) 61(-2.25,5.8) 62(-2.75,5.8) 63(-3.25,5.8) 64(-3.75,5.8)
  silkscreen extent -5.2,-4.15 4.15,5.25, body extent -6,-6.02 6,5.98, height 1.56
"PLS 5x1" [mm] "Connector; Header; 5 Position"
  rect 1.5x1.5 hole 0.9: 1(0,0)
  round 1.5 hole 0.9: 2(2.54,0) 3(5.08,0) 4(7.62,0) 5(10.16,0)
  silkscreen extent -1.27,-1.27 11.43,1.27, body extent -1.28,-1.28 11.42,1.26, height 8.54
"SB 0603" [mm] "Jumper"
  rect 0.1x0.1 smd: 1(-0.65,0) 2(0.85,0)
  Top Layer region: 0.12,-0.508 -0.388,0 0.12,0.508 -1.05,0.508 -1.05,-0.508
  Top Layer region: 0.641,-0.508 0.134,0 0.642,0.508 1.309,0.508 1.309,-0.508
  silkscreen extent -1.28,-0.7 1.53,0.7
SMA [mm]
  rrect20% 1.8x2 smd: 1(-2,0) 2(2,0)
  silkscreen extent -2.45,-1.5 3.2,1.5, body extent -2.74,-1.4 2.74,1.4, height 2.29
SMB [mm]
  rrect20% 2.5x2.3 smd: 1(-2.15,0) 2(2.15,0)
  silkscreen extent -2.42,-2 3.65,2, body extent -2.79,-1.97 2.79,1.97, height 2.65
SOD-123FL [mm]
  rect 0.95x1.05 smd: 1(0,0) 2(3.125,0)
  silkscreen extent 0.13,-0.92 3.8,0.92, body extent -0.22,-0.82 3.37,0.82, height 0.95
SOD-523 [mm]
  rect 0.4x0.5 smd: 1(0,0) 2(1.4,0)
  silkscreen extent 0.08,-0.45 1.75,0.45, body extent -0.1,-0.4 1.5,0.4, height 0.7
SOIC-8 [mm]
  oval 1.6x0.65 smd: 1(0,0) 2(0,-1.27) 3(0,-2.54) 4(0,-3.81) 5(5,-3.81) 6(5,-2.54) 7(5,-1.27) 8(5,0)
  silkscreen extent 1.1,-4.35 3.9,0.55, body extent -0.36,-4.35 5.41,0.55, height 1.45
"SOIC-28 Wide" [mm]
  oval 0.6x1.3 smd paste+0 mask+0.1: 1(0,0) 2(1.27,0) 3(2.54,0) 4(3.81,0) 5(5.08,0) 6(6.35,0) 7(7.62,0) 8(8.89,0) 9(10.16,0) 10(11.43,0) 11(12.7,0) 12(13.97,0) 13(15.24,0) 14(16.51,0) 15(16.51,9.906) 16(15.24,9.906) 17(13.97,9.906) 18(12.7,9.906) 19(11.43,9.906) 20(10.16,9.906) 21(8.89,9.906) 22(7.62,9.906) 23(6.35,9.906) 24(5.08,9.906) 25(3.81,9.906) 26(2.54,9.906) 27(1.27,9.906) 28(0,9.906)
  silkscreen extent -0.76,1.02 17.27,8.89, body extent -0.72,-0.25 17.21,10.06, height 2.48
SOT-23 [mm]
  rect 0.7x0.9 smd: 1(0,0) 2(1.9,0) 3(0.95,2.1)
  silkscreen extent -0.4,0.65 2.3,1.83, body extent -0.55,-0.17 2.45,2.23, height 1.1
SOT-23-5 [mm]
  rect 0.7x1 smd mask+0.045: 1(-0.95,0) 2(0,0) 3(0.95,0) 4(0.95,2.2) 5(-0.95,2.2)
  silkscreen extent -1.6,0.3 1.6,1.92, body extent -1.5,-0.15 1.5,2.35, height 1.1
TestPoint [mm]
  rrect20% 1x1 smd paste-0.5: 1(0,0)